# Altium PCB Slave v2.PcbDoc
Units mil, origin at the board's own origin, x right, y up, seen from the top; angles counter-clockwise.
Board outline 1720 x 1180 mil, 2 copper layers (Top Layer, Bottom Layer); 28 components, 15 nets, 80 pads, 0 vias.
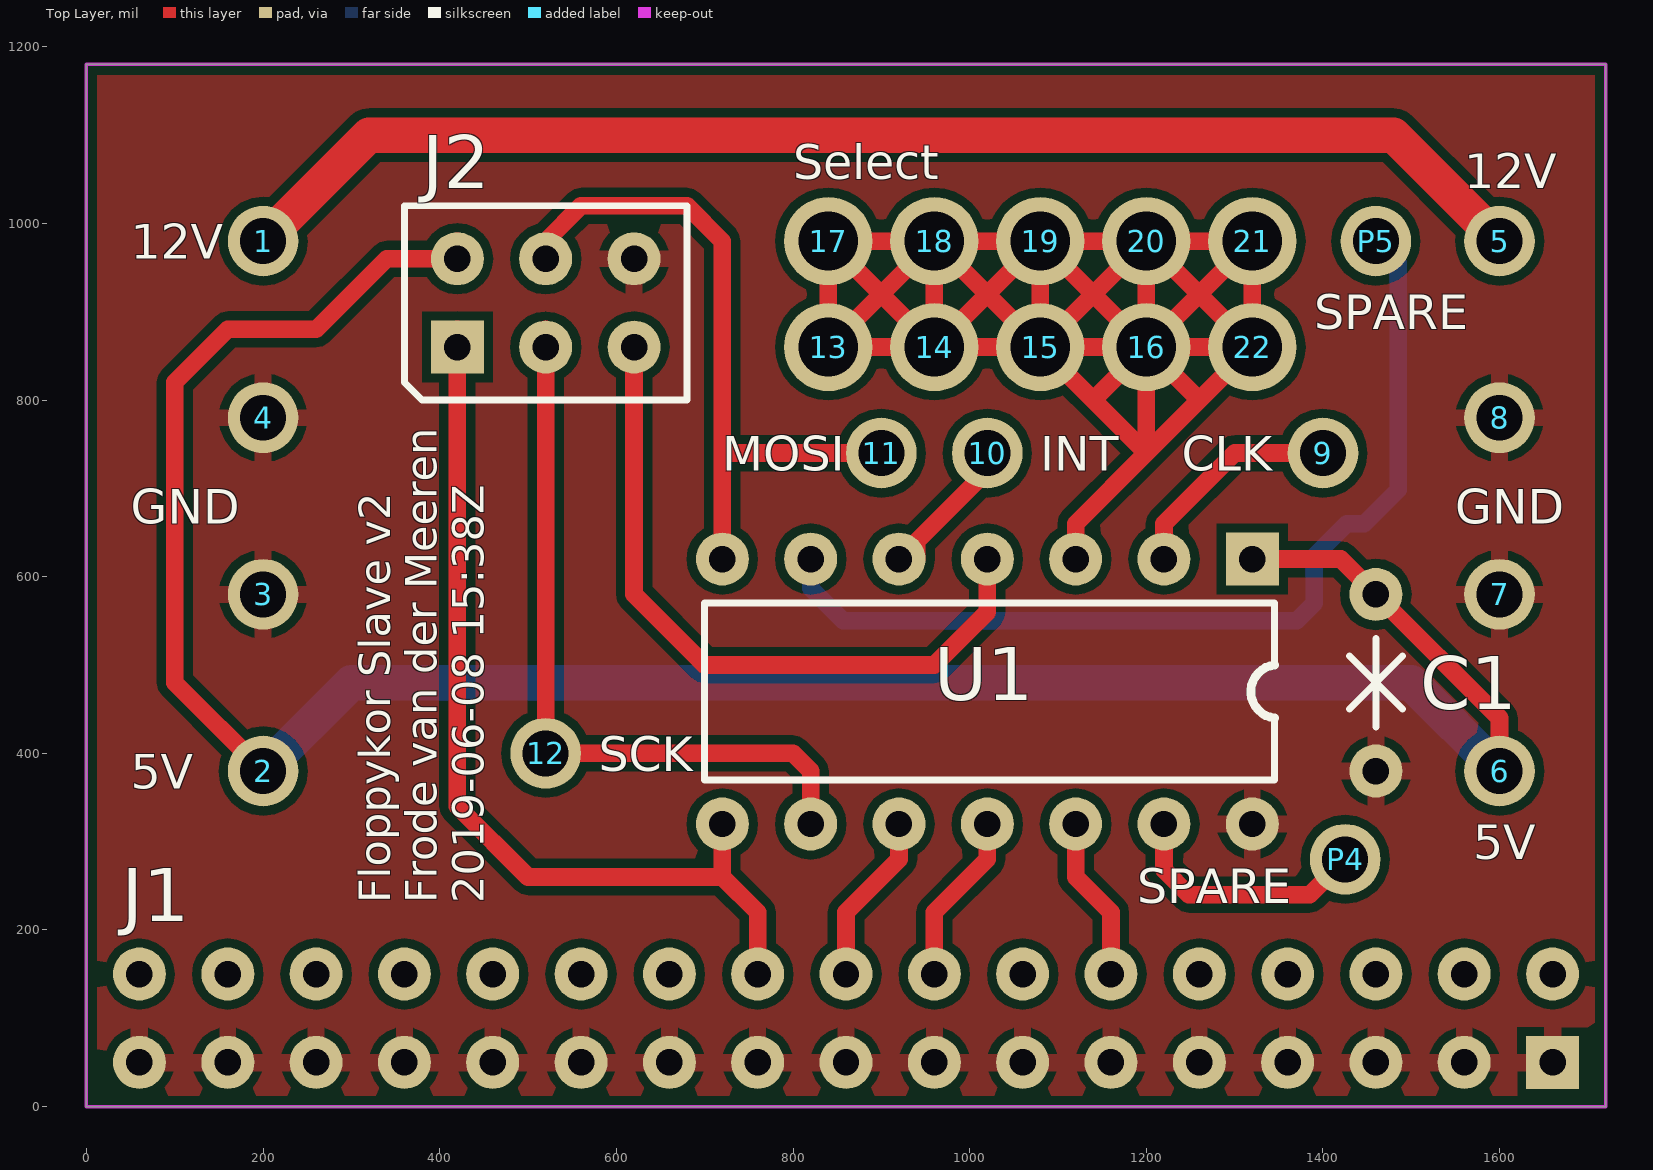
[diagram p0: Top Layer view]
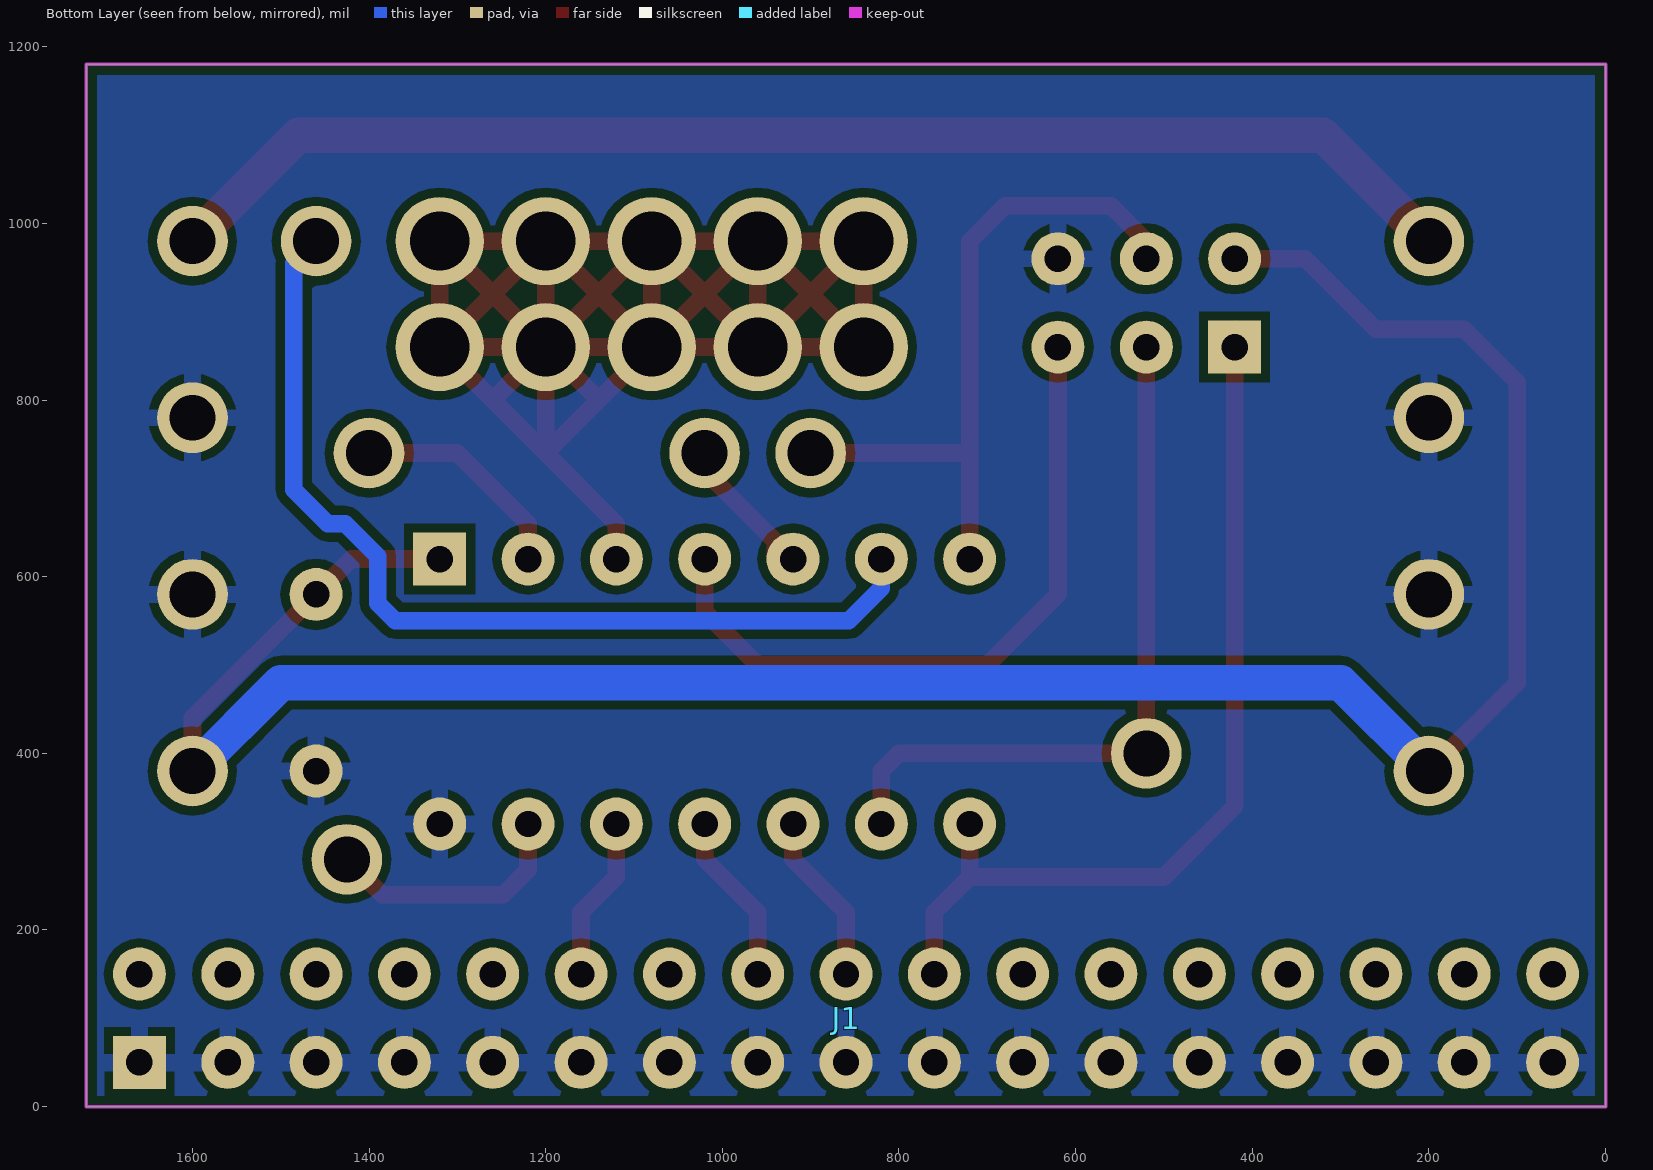
[diagram p1: Bottom Layer view, seen from below]

## Layer stack, top to bottom
Top Solder: solder mask 0.4, Solder Resist, Dk 3.5
Top Layer: signal copper 1.4
Dielectric 1: dielectric 12.6, FR-4, Dk 4.8
Bottom Layer: signal copper 1.4
Bottom Solder: solder mask 0.4, Solder Resist, Dk 3.5

## Board outline
0,0 1720,0 1720,1180 0,1180

## Design rules (kind name [scope] priority, off if disabled: settings)
Clearance [All] p1: gap=10 ignorepadtopadclearanceinfootprint=FALSE except(0: Arc-Hole Track-Hole SMDPad-Hole THPad-Hole Via-Hole Fill-Hole Poly-Hole Region-Hole Text-Hole)
PolygonConnect [All] p1: connectstyle=Relief reliefconductorwidth=19.68 reliefentries=4 polygonreliefangle="90 Angle" airgapwidth=9.84
RoutingVias [All] p1: holewidth=28 width=50 viastyle="Through Hole" minholewidth=28 minwidth=50 maxholewidth=28 maxwidth=50
SolderMaskExpansion [All] p1: expansion=4
Width [All] p1: maxlimit=100 minlimit=20 preferedwidth=20
30 further rules are at their usual default settings.

## Components (designator, comment, footprint, x,y, rotation, side; value= is the part's Value field where it differs from the comment)
1 "BigHole" MEDHOLE 3200,480 r90 top
2 "BigHole" MEDHOLE 3200,-120 r90 top
3 "BigHole" MEDHOLE 3200,80 r90 top
4 "BigHole" MEDHOLE 3200,280 r90 top
5 "BigHole" MEDHOLE 4600,480 r90 top
6 "BigHole" MEDHOLE 4600,-120 r90 top
7 "BigHole" MEDHOLE 4600,80 r90 top
8 "BigHole" MEDHOLE 4600,280 r90 top
9 "BigHole" MEDHOLE 4400,240 r90 top
10 "BigHole" MEDHOLE 520,-2260 r0 top
11 "BigHole" MEDHOLE 400,-2260 r0 top
12 "BigHole" MEDHOLE 20,-2600 r0 top
13 "BigHole" BigHole 740,560 r0 top
14 "BigHole" BigHole 860,560 r0 top
15 "BigHole" BigHole 980,560 r0 top
16 "BigHole" BigHole 1100,560 r0 top
17 "BigHole" BigHole 740,680 r0 top
18 "BigHole" BigHole 860,680 r0 top
19 "BigHole" BigHole 980,680 r0 top
20 "BigHole" BigHole 1100,680 r0 top
21 "BigHole" BigHole 1220,680 r0 top
22 "BigHole" BigHole 1220,560 r0 top
C1 "Component_1" 200mil 1460,480 r90 top
J1 "Component_1" Header34 1660,-449.84 r180 bottom
J2 "AVR_ISP" HEADER6 220,360 r0 top
P4 "BigHole" MEDHOLE 925.22,-2720 r0 top
P5 "BigHole" MEDHOLE 960,-2020 r0 top
U1 "ATTiny84" DIP14 1820,1120 r180 top

## Footprints (in the part's own frame and the unit in brackets; to place one, negate y for a bottom-side part, rotate by r counter-clockwise, add the part's x,y. Pads: shape width x height; smd on the part's side, far side on the other; paste and mask are expansions set on the pad)
200mil [mil]
  round 60 hole 30: 1(-100,0) 2(100,0)
  silkscreen extent -50,-30 50,30
BigHole [mil]
  round 100 hole 67: 1(100,300)
DIP14 [mil]
  rect 60x60 hole 30: 1(500,500)
  round 60 hole 30: 2(600,500) 3(700,500) 4(800,500) 5(900,500) 6(1000,500) 7(1100,500) 8(1100,800) 9(1000,800) 10(900,800) 11(800,800) 12(700,800) 13(600,800) 14(500,800)
  silkscreen extent 475,550 1120,750
HEADER6 [mil]
  rect 60x60 hole 30: 1(200,500)
  round 60 hole 30: 2(200,600) 3(300,500) 4(300,600) 5(400,500) 6(400,600)
  silkscreen extent 140,440 460,660
Header34 [mil]
  rect 60x60 hole 30: 1(0,500)
  round 60 hole 30: 2(0,600) 3(100,500) 4(100,600) 5(200,500) 6(200,600) 7(300,500) 8(300,600) 9(400,500) 10(400,600) 11(500,500) 12(500,600) 13(600,500) 14(600,600) 15(700,500) 16(700,600) 17(800,500) 18(800,600) 19(900,500) 20(900,600) 21(1000,500) 22(1000,600) 23(1100,500) 24(1100,600) 25(1200,500) 26(1200,600) 27(1300,500) 28(1300,600) 29(1400,500) 30(1400,600) 31(1500,500) 32(1500,600) 33(1600,500) 34(1600,600)
MEDHOLE [mil]
  round 80 hole 52: 1(500,3000)

## Nets (pads, with @x,y where several pads share a name; then routed paths per layer and width w, separated by ;. In a path a pad name is that pad's centre, name@x,y a point inside that pad or via, vN(x,y) a via of type N, cw(c..) or ccw(c..) an arc to the next point about the centre after c; other vN are vias at no path point)
GND: 3.1 4.1 7.1 8.1 C1.1 J1.1 J1.3 J1.5 J1.7 J1.9 J1.11 J1.13 J1.15 J1.17 J1.19 J1.21 J1.23 J1.25 J1.27 J1.29 J1.31 J1.33 J2.6 U1.14
Net1_1: 1.1 5.1 | length 1499.4
  Top Layer w40: 1.1 320,1100 1480,1100 5.1
Net9_1: 9.1 U1.2 | length 253.1
  Top Layer w20: U1.2 1220,660 1300,740 9.1
Net10_1: 10.1 U1.5 | length 133.1
  Top Layer w20: U1.5@940,620 940,640 10.1@1020,720
Net11_1: 11.1 J2.4 U1.7 | length 773.1
  Top Layer w20: J2.4@520,980 560,1020 680,1020 720,980 720,740 ; U1.7 720,740 ; 11.1 720,740
Net12_1: 12.1 J2.3 U1.9 | length 876.6
  Top Layer w20: J2.3@520,880 520,380 540,400 800,400 820,380 U1.9
Net13_1: 13.1 14.1 15.1 16.1 17.1 18.1 19.1 20.1 21.1 22.1 U1.3 | length 3631.6
  Top Layer w20: U1.3 1120,660 1200,740 ; 16.1@1160,860 15.1 ; 21.1@1300,960 1260,920 ; 13.1 900,920 ; 13.1 14.1 ; 13.1 17.1 ; 17.1 900,920 ; 17.1 18.1 ; 900,920 18.1 ; 900,920 14.1 ; 14.1 1020,920 ; 14.1 18.1 ; 14.1 15.1 ; 18.1 1020,920 ; 18.1 19.1 ; 1020,920 19.1 ; 1020,920 15.1 ; 15.1 1140,800 ; 15.1 1140,920 ; 15.1 19.1 ; 19.1 1140,920 ; 19.1 20.1 ; 1140,800 1200,740 ; 1140,800 16.1 ; 1140,920 16.1 ; 1140,920 20.1 ; 1200,740 1260,800 ; 1200,740 16.1 ; 16.1 1260,800 ; 16.1 1260,920 ; 16.1 20.1 ; 16.1 22.1 ; 20.1 1260,920 ; 20.1 21.1 22.1 ; 1260,800 22.1 ; 1260,920 22.1
NetJ1_12: J1.12 U1.12 | length 176.6
  Top Layer w20: U1.12 1120,260 1160,220 J1.12@1160,160
NetJ1_16: J1.16 U1.11 | length 184.9
  Top Layer w20: J1.16@960,160 960,220 1020,280 U1.11
NetJ1_18: J1.18 U1.10 | length 184.9
  Top Layer w20: J1.18@860,160 860,220 920,280 U1.10
NetJ1_20: J1.20 J2.1 U1.8 | length 1049.7
  Top Layer w20: J2.1@420,880 420,340 500,260 720,260 ; U1.8 720,260 ; J1.20@760,160 760,220 720,260
NetJ2_5: J2.5 U1.4 | length 798
  Top Layer w20: J2.5 620,580 700,500 960,500 1020,560 U1.4
NetP4_1: P4.1 U1.13 | length 285.2
  Top Layer w20: U1.13 1220,268.23 1248.23,240 1385.22,240 P4.1
NetP5_1: P5.1 U1.6 | length 1098.2
  Bottom Layer w20: U1.6 820,586.99 856.99,550 1370.17,550 1390,569.83 1390,623.04 1426.96,660 1446.82,660 1485.22,698.39 1485.22,954.78 P5.1
VCC: 2.1 6.1 C1.2 J2.2 U1.1 | length 2765.1
  Top Layer w20: 2.1 100,480 100,820 160,880 260,880 340,960 400,960 J2.2@420,980 ; U1.1 1420,620 C1.2 1600,440 6.1
  Bottom Layer w40: 2.1 300,480 1500,480 6.1
pads on no net: J1.2 J1.4 J1.6 J1.8 J1.10 J1.14 J1.22 J1.24 J1.26 J1.28 J1.30 J1.32 J1.34

## Polygon pours and split planes (outlines as drawn)
GND on Top Layer "GND" (solid, pour order 2): 0,0 0,1180 1720,1180 1720,0 0,0
GND on Bottom Layer "GND" (solid, remove dead copper, pour order 4): 0,1180 1720,1180 1720,0 0,0

## Keep-outs
Keep-Out Layer:
  the board outline again, w3.94

## Silkscreen, mask and mechanical layers (free items; w line width, h text height)
Top Overlay:
  text "Select" at 800,1050 h39.37
  text "12V" at 1560,1040 h39.37
  text "12V" at 50,960 h39.37
  text "SPARE" at 1390,880 h39.37
  text "MOSI" at 720,720 h39.37
  text "INT" at 1080,720 h39.37
  text "CLK" at 1240,720 h39.37
  text "GND" at 50,660 h39.37
  text "GND" at 1550,660 h39.37
  text "SCK" at 580,380 h39.37
  text "5V" at 50,360 h39.37
  text "5V" at 1570,280 h39.37
  text "Floppykor Slave v2 / Frode van der Meeren / 2019-06-08 15:38Z" at 450,230 h35.43 r90
  text "SPARE" at 1190,230 h39.37